# Altium PCB Lights Tester.PcbDoc
Units mil, origin at the board's own origin, x right, y up, seen from the top; angles counter-clockwise.
Board outline 2401 x 2630 mil, 2 copper layers (Top Layer, Bottom Layer); 22 components, 23 nets, 101 pads, 6 vias.
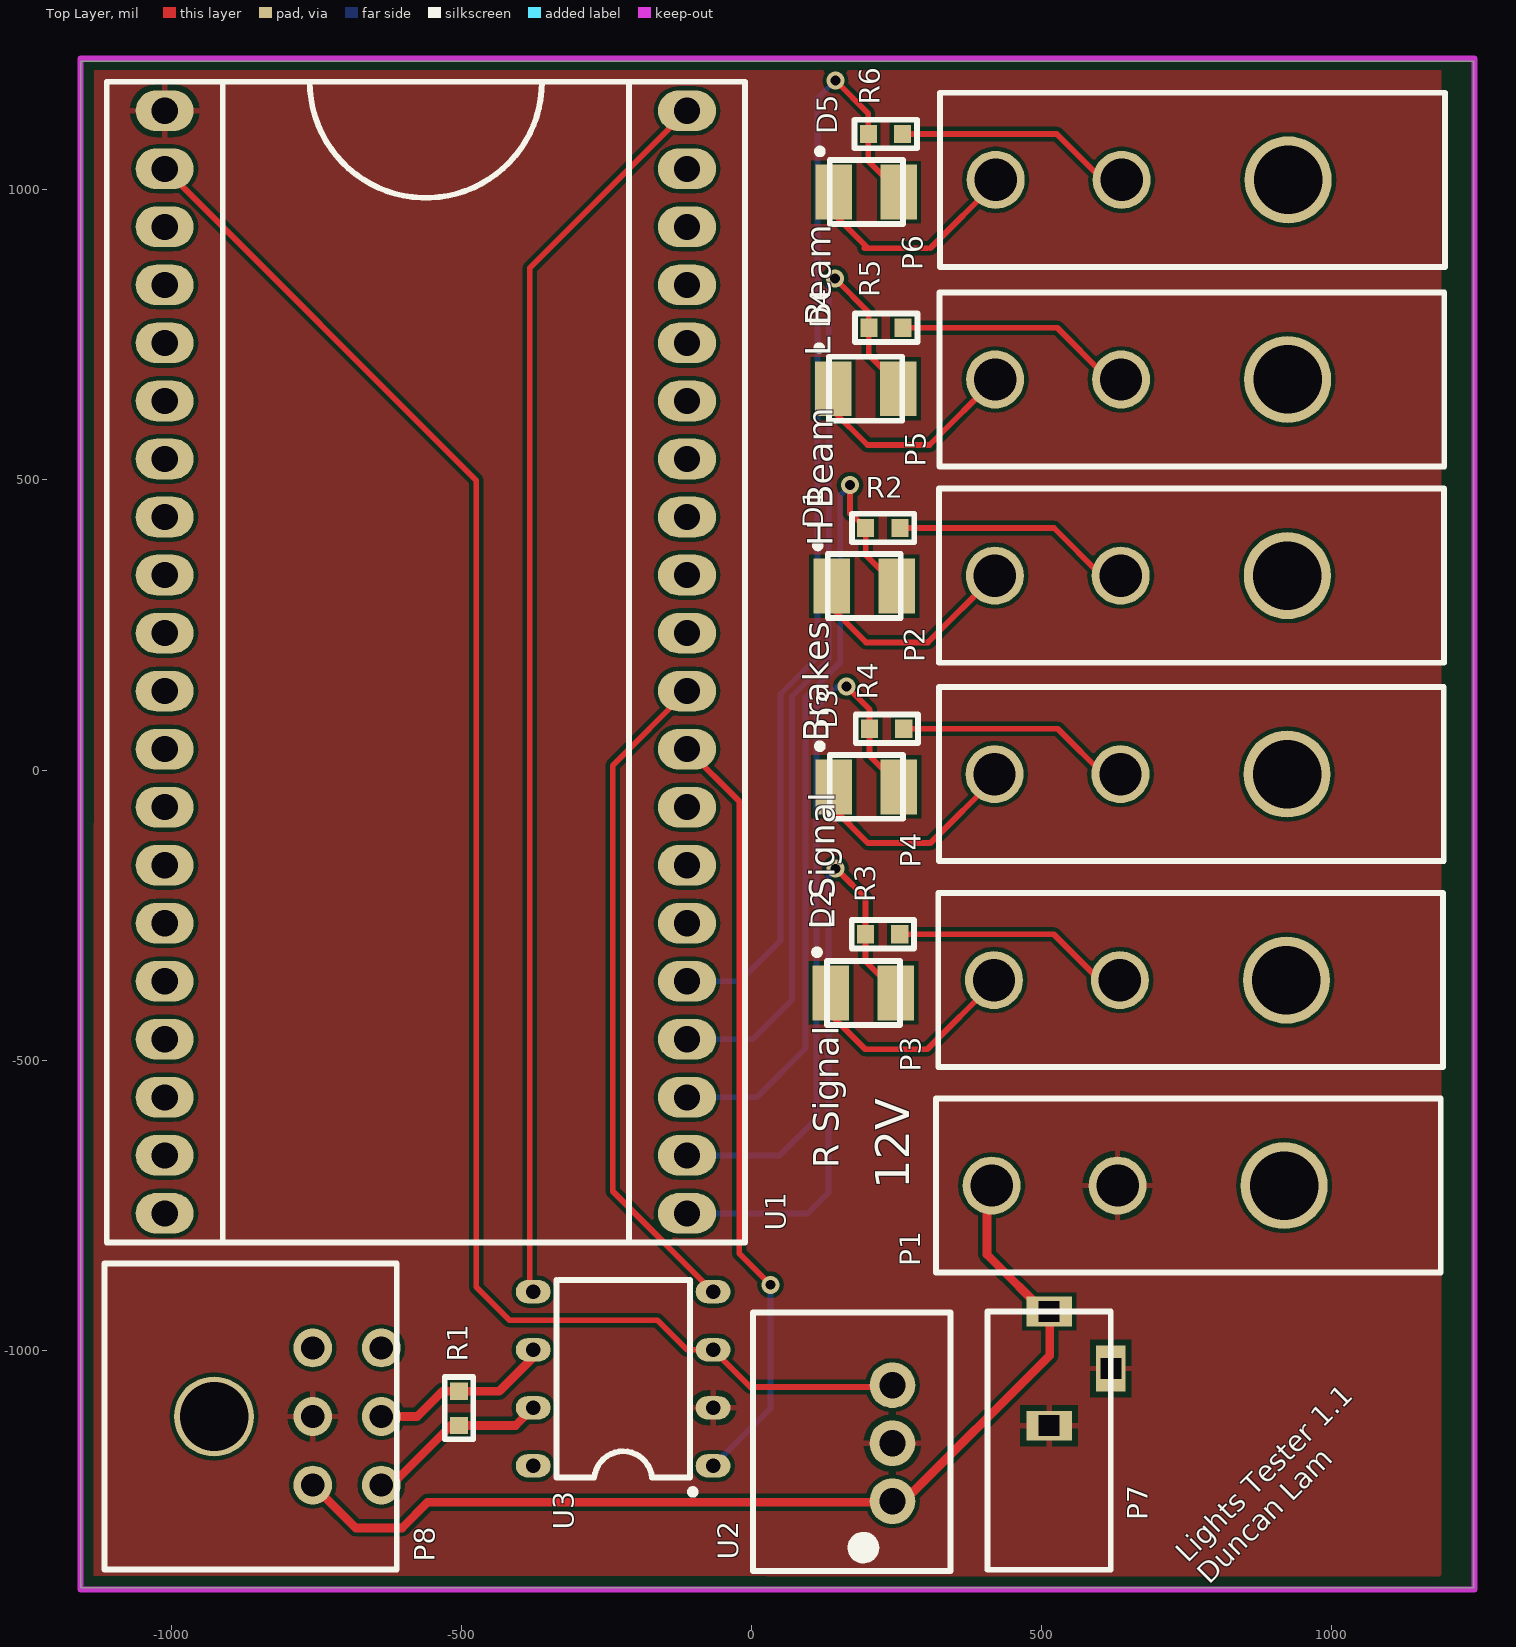
[diagram p0: Top Layer view]
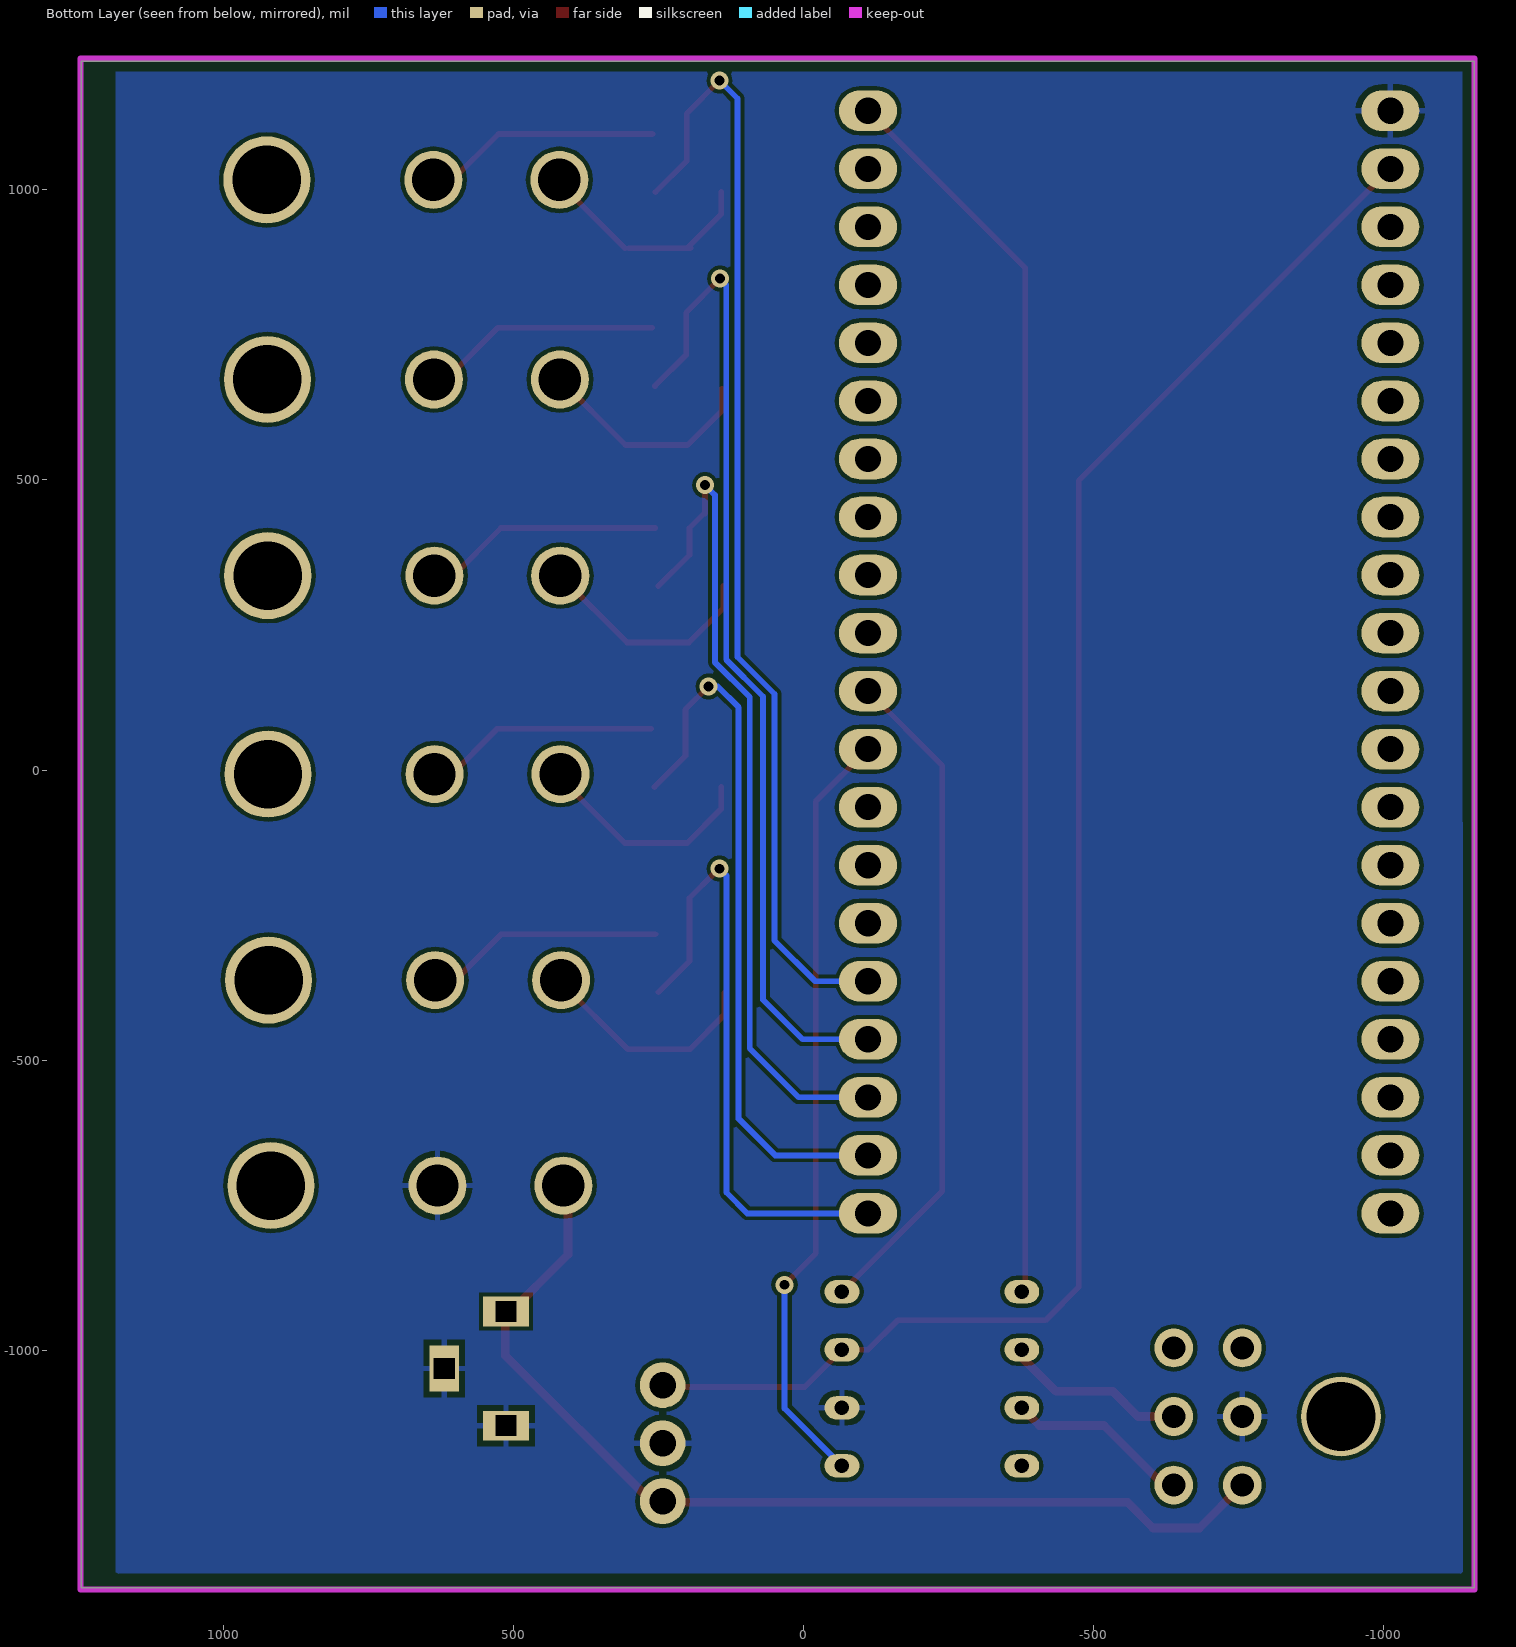
[diagram p1: Bottom Layer view, seen from below]
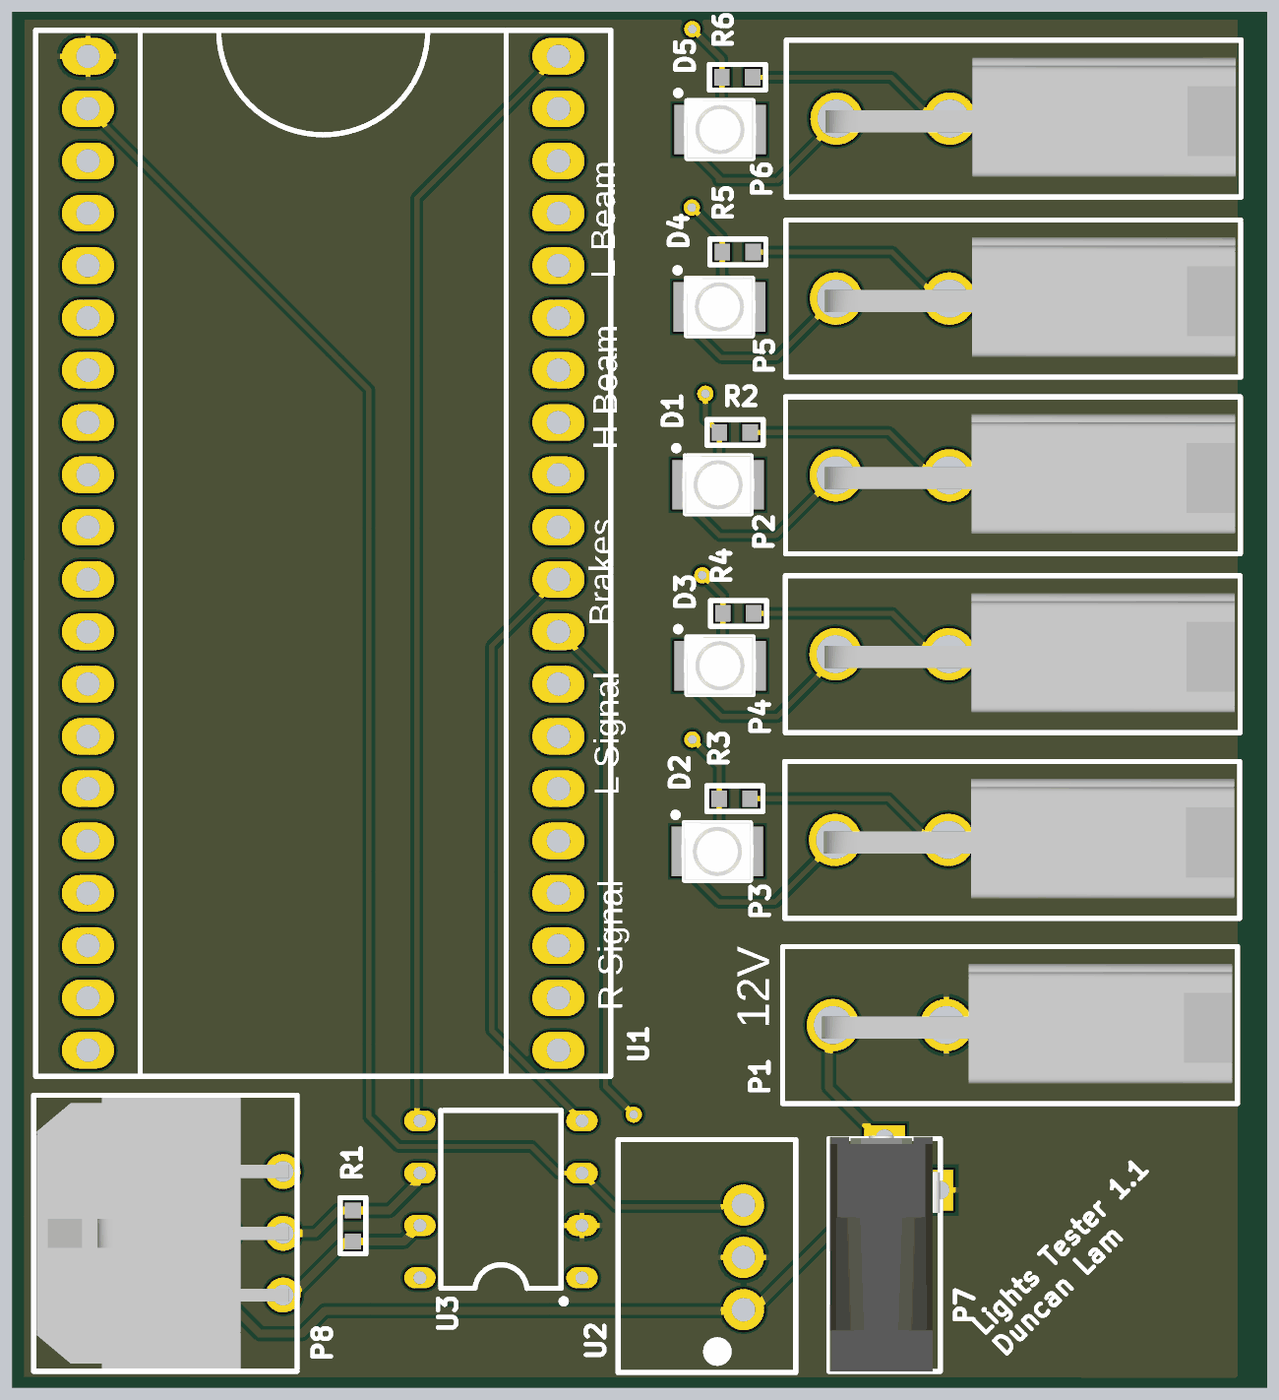
[diagram p2: 3D render of the assembled board from above, using the file's embedded part models]

## Layer stack, top to bottom
Top Solder: solder mask 0.4, Solder Resist, Dk 3.5
Top Layer: signal copper 1.4
Dielectric 1: dielectric 12.6, FR-4, Dk 4.8
Bottom Layer: signal copper 1.4
Bottom Solder: solder mask 0.4, Solder Resist, Dk 3.5

## Board outline
-1156,-1409 1245,-1409 1245,1221 -1156,1221

## Design rules (kind name [scope] priority, off if disabled: settings)
BoardOutlineClearance [All] p1: gap=15
Clearance [All] p1: gap=7
DiffPairsRouting [All] p1: maxlimit=10 minlimit=10 mostfreqgap=10 toplayer_minwidth=15 toplayer_maxwidth=15 toplayer_prefwidth=15 bottomlayer_minwidth=15 bottomlayer_maxwidth=15 bottomlayer_prefwidth=15 maxuncoupledlength=500
MinimumAnnularRing [All] p1: minimumring=7
PolygonConnect [All] p1: connectstyle=Relief reliefconductorwidth=10 reliefentries=4 polygonreliefangle="90 Angle" airgapwidth=10
RoutingVias [All] p1: holewidth=28 width=50 viastyle="Through Hole" minholewidth=13 minwidth=50 maxholewidth=28 maxwidth=50
SolderMaskExpansion [All] p1: expansion=4
Width 12V [InNet('12V')] p1: maxlimit=15 minlimit=15 preferedwidth=15
Width Width_1 [All] p2: maxlimit=15 minlimit=10 preferedwidth=10
29 further rules are at their usual default settings.

## Classes and differential pairs
differential pair CAN1: +CAN1_P -CAN1_N

## Components (designator, comment, footprint, x,y, rotation, side; value= is the part's Value field where it differs from the comment)
D1 "LED RED" "RED LED" 194.41,317 r270 top
D2 "LED RED" "RED LED" 193,-384 r270 top
D3 "LED RED" "RED LED" 198,-29 r270 top
D4 "LED RED" "RED LED" 196.9,657 r270 top
D5 "LED RED" "RED LED" 198,996 r270 top
P1 "Molex Mini-Fit 1x2" "Molex Mini-Fit Jr 2x1" 918,-716 r90 top
P2 "Molex Mini-Fit 1x2" "Molex Mini-Fit Jr 2x1" 923.42,335 r90 top
P3 "Molex Mini-Fit 1x2" "Molex Mini-Fit Jr 2x1" 922,-362 r90 top
P4 "Molex Mini-Fit 1x2" "Molex Mini-Fit Jr 2x1" 923,-7 r90 top
P5 "Molex Mini-Fit 1x2" "Molex Mini-Fit Jr 2x1" 924,673 r90 top
P6 "Molex Mini-Fit 1x2" "Molex Mini-Fit Jr 2x1" 925,1017 r90 top
P7 "PJ-007" "BARREL JACK PJ007" 513,-933 r90 top
P8 "CCS" PCB_MLX_MICROFIT_3X2 -926,-1114 r270 top
R1 "120" PCB_GENERIC_SMD_0603 -504,-1100 r90 top
R2 "SCH_GENERIC_RESISTOR_0603" PCB_GENERIC_SMD_0603 226.42,417 r0 top
R3 "SCH_GENERIC_RESISTOR_0603" PCB_GENERIC_SMD_0603 226,-283 r0 top
R4 "SCH_GENERIC_RESISTOR_0603" PCB_GENERIC_SMD_0603 233,71 r0 top
R5 "SCH_GENERIC_RESISTOR_0603" PCB_GENERIC_SMD_0603 231.9,762 r0 top
R6 "SCH_GENERIC_RESISTOR_0603" PCB_GENERIC_SMD_0603 231,1096 r0 top
U1 "LPC1768 mbed" "LPC 1768 mbed Layout" -561,186 r0 top
U2 "R78E-1.0 DC/DC" R78-1.0 243,-1160 r90 top
U3 "MCP2562" MCP2562 -221,-1049 r180 top

## Footprints (in the part's own frame and the unit in brackets; to place one, negate y for a bottom-side part, rotate by r counter-clockwise, add the part's x,y. Pads: shape width x height; smd on the part's side, far side on the other; paste and mask are expansions set on the pad)
"BARREL JACK PJ007" [mm] "Pin connections for Barrel Jack"
  rect 1.3x2 hole 0.9 square: 1(0,0) 2(-5,0)
  rect 2x1.3 hole 0.9 square: 3(-2.5,-2.7)
  silkscreen extent -11.3,-2.7 0,2.7, body extent -11.31,-2.68 0.14,2.67, height 7.4
"LPC 1768 mbed Layout" [mil]
  oval 100x70 hole 45: 1(-450,950) 2(-450,850) 3(-450,750) 4(-450,650) 5(-450,550) 6(-450,450) 7(-450,350) 8(-450,250) 9(-450,150) 10(-450,50) 11(-450,-50) 12(-450,-150) 13(-450,-250) 14(-450,-350) 15(-450,-450) 16(-450,-550) 17(-450,-650) 18(-450,-750) 19(-450,-850) 20(-450,-950) 21(450,-950) 22(450,-850) 23(450,-750) 24(450,-650) 25(450,-550) 26(450,-450) 27(450,-350) 28(450,-250) 29(450,-150) 30(450,-50) 31(450,50) 32(450,150) 33(450,250) 34(450,350) 35(450,450) 36(450,550) 37(450,650) 38(450,750) 39(450,850) 40(450,950)
  silkscreen extent -550,-1000 550,1000, body extent -545,-990 545,1000, height 260
MCP2562 [mil]
  oval 60x40 hole 25: 1(-155,150) 2(-155,50) 3(-155,-50) 4(-155,-150) 5(155,-150) 6(155,-50) 7(155,50) 8(155,150)
  silkscreen extent -125,-170 115,200, body extent -115,-170 115,170, height 210
"Molex Mini-Fit Jr 2x1" [mil]
  round 100 hole 73: 1(0,287) 2(0,504)
  round 150 hole 118: ""(0,0)
  silkscreen extent -150,-270 150,600, body extent -111,-260 117,525, height 449
PCB_GENERIC_SMD_0603 [mm]
  rect 0.75x0.8 smd: 1(-0.75,0) 2(0.75,0)
  silkscreen extent -1.35,-0.63 1.38,0.63, body extent -0.75,-0.5 0.75,0.5, height 0.45
PCB_MLX_MICROFIT_3X2 [mm]
  round 1.7 hole 1.02: 1(3,4.32) 2(0,4.32) 3(-3,4.32) 4(3,7.32) 5(0,7.32) 6(-3,7.32)
  round 3.5 hole 3: ""(0,0)
  silkscreen extent -6.7,-4.8 6.7,8, body extent -6.57,-4.65 6.58,7.59, height 8.83
R78-1.0 [mm]
  round 2 hole 1.15: 1(-2.54,0) 2(0,0) 3(2.54,0)
  silkscreen extent -5.59,-2.54 5.71,6.1, body extent -4.44,-1.59 4.45,5.4, height 10.4
"RED LED" [mm]
  rect 2.4x1.6 smd: 1(0,-1.425) 2(0,1.425)
  silkscreen extent -1.9,-2.16 1.4,1.6, body extent -1.4,-1.75 1.4,1.75, height 1.88

## Part data
P7: library part Component_1
P8: library part SCH_MLX_MICROFIT_3X2
R1: library part SCH_GENERIC_RESISTOR_0603, "120 Ohms"
R2 R3 R4 R5 R6: "Generic SMD resistor 0603"
U2: library part R78E-1.0

## Via types
v1: diameter 31, hole 17, Top Layer to Bottom Layer, 6 vias

## Nets (pads, with @x,y where several pads share a name; then routed paths per layer and width w, separated by ;. In a path a pad name is that pad's centre, name@x,y a point inside that pad or via, vN(x,y) a via of type N, cw(c..) or ccw(c..) an arc to the next point about the centre after c; other vN are vias at no path point)
3.3V: U1.40 U3.5 | length 2149.7
  Top Layer w10: U3.5 -382,-893 -382,865 U1.40
5V: U1.2 U2.3 U3.3 | length 2945.3
  Top Layer w10: U1.2 -474,499 -474,-891 -417,-948 -162,-948 -111,-999 U3.3 -2,-1063 228,-1063 U2.3@244,-1079
12V: P1.2 P7.1 P8.1 U2.1 | length 1761.3
  Top Layer w15: P8.1 -682.03,-1306 -602,-1306 -558,-1262 261,-1262 514,-1009 514,-943 406,-835 P1.2@406,-716
BRAKES: D1.2 R2.1 U1.23 | length 1450.9
  Top Layer w10: v1(170,491) 170,442 170.95,442.95 R2.1 196.89,370.62 D1.2
  Bottom Layer w10: U1.23 9,-564 93,-480 93,125.77 153,185.77 153,474 v1(170,491)
CAN1_N: P8.5 R1.2 U3.6 | length 317.1
  Top Layer w15: P8.5 -576,-1114 -532.47,-1070.47 R1.2 -434.47,-1070.47 -376,-1012 U3.6
CAN1_P: P8.4 R1.1 U3.7 | length 316.9
  Top Layer w15: P8.4 -620.11,-1232.11 -517.53,-1129.53 R1.1 -406.53,-1129.53 U3.7
GND: P1.1 P7.2 P7.3 P8.2 U1.1 U2.2 U3.2
"HEADLIGHTS (HIGH)": D4.2 R5.1 U1.24 | length 1714.2
  Top Layer w10: v1(144,847) 202.37,788.63 R5.1 202.37,715.62 D4.2@255.99,662
  Bottom Layer w10: U1.24 2,-464 70,-396 70,126.81 133.42,190.23 133.42,836.42 v1(144,847)
"HEADLIGHTS (LOW)": D5.2 R6.1 U1.25 | length 1948.9
  Top Layer w10: v1(145,1188) 201.47,1131.53 R6.1 201.47,1049.62 D5.2@255.09,996
  Bottom Layer w10: U1.25 -20,-364 50,-294 50,130.85 114,194.85 114,1157 v1(145,1188)
"LEFT SIGNAL": D3.2 R4.1 U1.22 | length 1236.6
  Top Layer w10: v1(164,144) 203.47,104.53 R4.1 203.47,24.62 D3.2@257.09,-29
  Bottom Layer w10: U1.22 49,-664 112,-601 112,108 148,144 v1(164,144)
NetD1_1: D1.1 P2.2 | length 391.1
  Top Layer w10: D1.1 138.31,279.11 197.42,220 304.42,220 P2.2
NetD2_1: D2.1 P3.2 | length 391.1
  Top Layer w10: D2.1 136.9,-421.89 196.01,-481 303.01,-481 P3.2@418.01,-366
NetD3_1: D3.1 P4.2 | length 391.1
  Top Layer w10: D3.1 141.9,-66.89 201.01,-126 308.01,-126 P4.2@423.01,-11
NetD4_1: D4.1 P5.2 | length 391.1
  Top Layer w10: D4.1 140.8,619.11 199.91,560 306.91,560 P5.2@421.91,675
NetD5_1: D5.1 P6.2 | length 391.1
  Top Layer w10: D5.1 141.9,958.11 201.01,899 ; 195.01,899 302.01,899 ; 308.01,899 P6.2@423.01,1014
NetP2_1: P2.1 R2.2 | length 414.4
  Top Layer w10: R2.2 521.42,417 603.42,335 P2.1
NetP3_1: P3.1 R3.2 | length 381.4
  Top Layer w10: R3.2 521,-283 P3.1@603,-365
NetP4_1: P4.1 R4.2 | length 381.4
  Top Layer w10: R4.2 528,71 P4.1@610,-11
NetP5_1: P5.1 R5.2 | length 381.4
  Top Layer w10: R5.2 526.9,762 P5.1@608.9,680
NetP6_1: P6.1 R6.2 | length 381.4
  Top Layer w10: R6.2 526,1096 P6.1@608,1014
NetU1_29: U1.29 U3.1 | length 1342.7
  Top Layer w10: U1.29 -21,-54 -21,-833 v1(33,-887)
  Bottom Layer w10: U3.1@-71,-1204 33,-1100 v1(33,-887)
NetU1_30: U1.30 U3.4 | length 1159.7
  Top Layer w10: U1.30 -239,8 -239,-726 U3.4
"RIGHT SIGNAL": D2.2 R3.1 U1.21 | length 1068.1
  Top Layer w10: v1@153,-177 196.47,-220.47 R3.1 196.47,-329.38 D2.2@250.09,-383
  Bottom Layer w10: U1.21 97,-764 133,-728 133,-182 v1(145,-170)
pads on no net: P1. P2. P3. P4. P5. P6. P8. P8.3 P8.6 U1.3 U1.4 U1.5 U1.6 U1.7 U1.8 U1.9 U1.10 U1.11 U1.12 U1.13 U1.14 U1.15 U1.16 U1.17 U1.18 U1.19 U1.20 U1.26 U1.27 U1.28 U1.31 U1.32 U1.33 U1.34 U1.35 U1.36 U1.37 U1.38 U1.39 U3.8

## Polygon pours and split planes (outlines as drawn)
GND on Top Layer "GND_top" (solid, remove dead copper, pour order 0): -1132.36,1208 1188.64,1208 1188.64,-1379 1188.64,-1390 -1133.36,-1388.72
GND on Bottom Layer "GND_bottom" (solid, remove dead copper, pour order 2): -1134.92,1202.96 -1132.92,1202.96 1185.08,1202.96 1185.08,-1389.04 1182.08,-1386.04 1176.08,-1384.04 -1135.92,-1385.04

## Keep-outs
Keep-Out Layer:
  lines w10: -1156,-1412 1246,-1412 1246,1226 -1156,1226 -1156,-1389 -1156,-1412

## Silkscreen, mask and mechanical layers (free items; w line width, h text height)
Top Overlay:
  text "L Beam" at 151,713 h75 r90
  text "H Beam" at 155,386 h75 r90
  text "Brakes" at 148,49 h75 r90
  text "L Signal" at 158,-275 h75 r90
  text "R Signal" at 165,-686 h75 r90
  text "12V" at 292,-722 h100 r90
  text "Lights Tester 1.1 / Duncan Lam" at 789,-1405 h35 r45